# Altium PCB PCB3.PcbDoc (part 1 of 2)
Units mm, origin at the board's own origin, x right, y up, seen from the top; angles counter-clockwise.
Board outline 119.3 x 82.3 mm, 2 copper layers (Top Layer, Bottom Layer); 268 components, 205 nets, 699 pads, 173 vias.
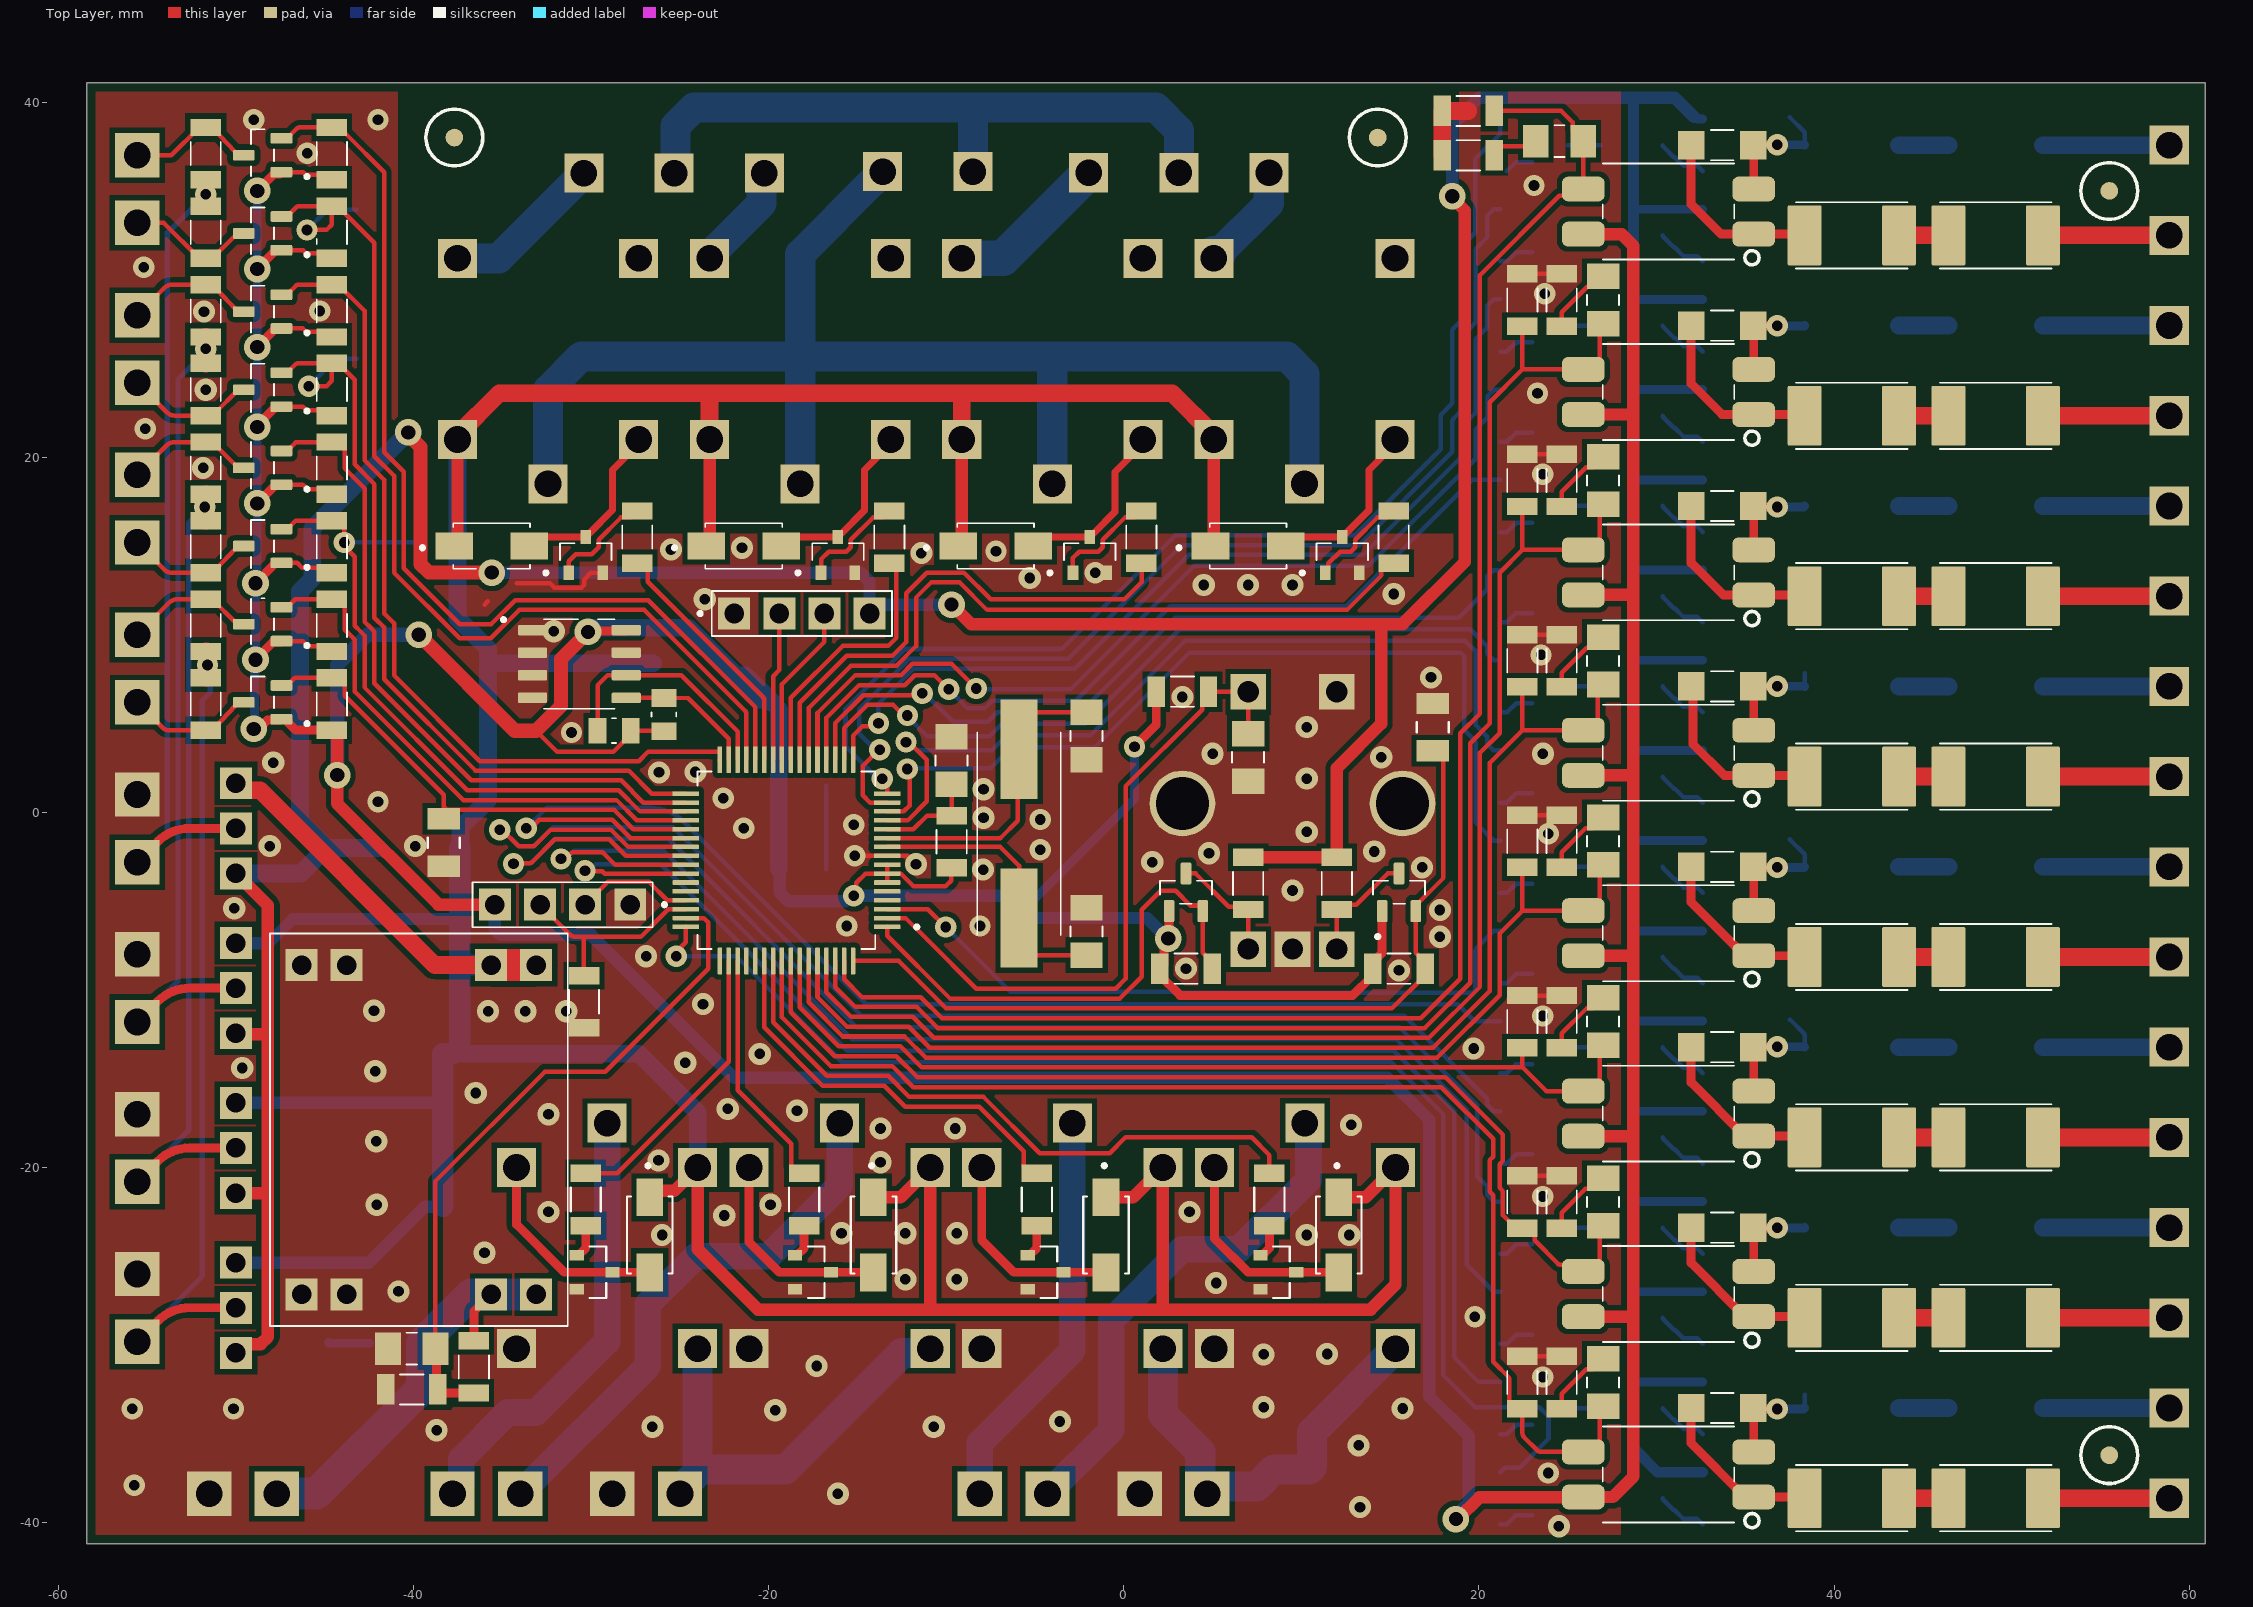
[diagram p0: Top Layer view]
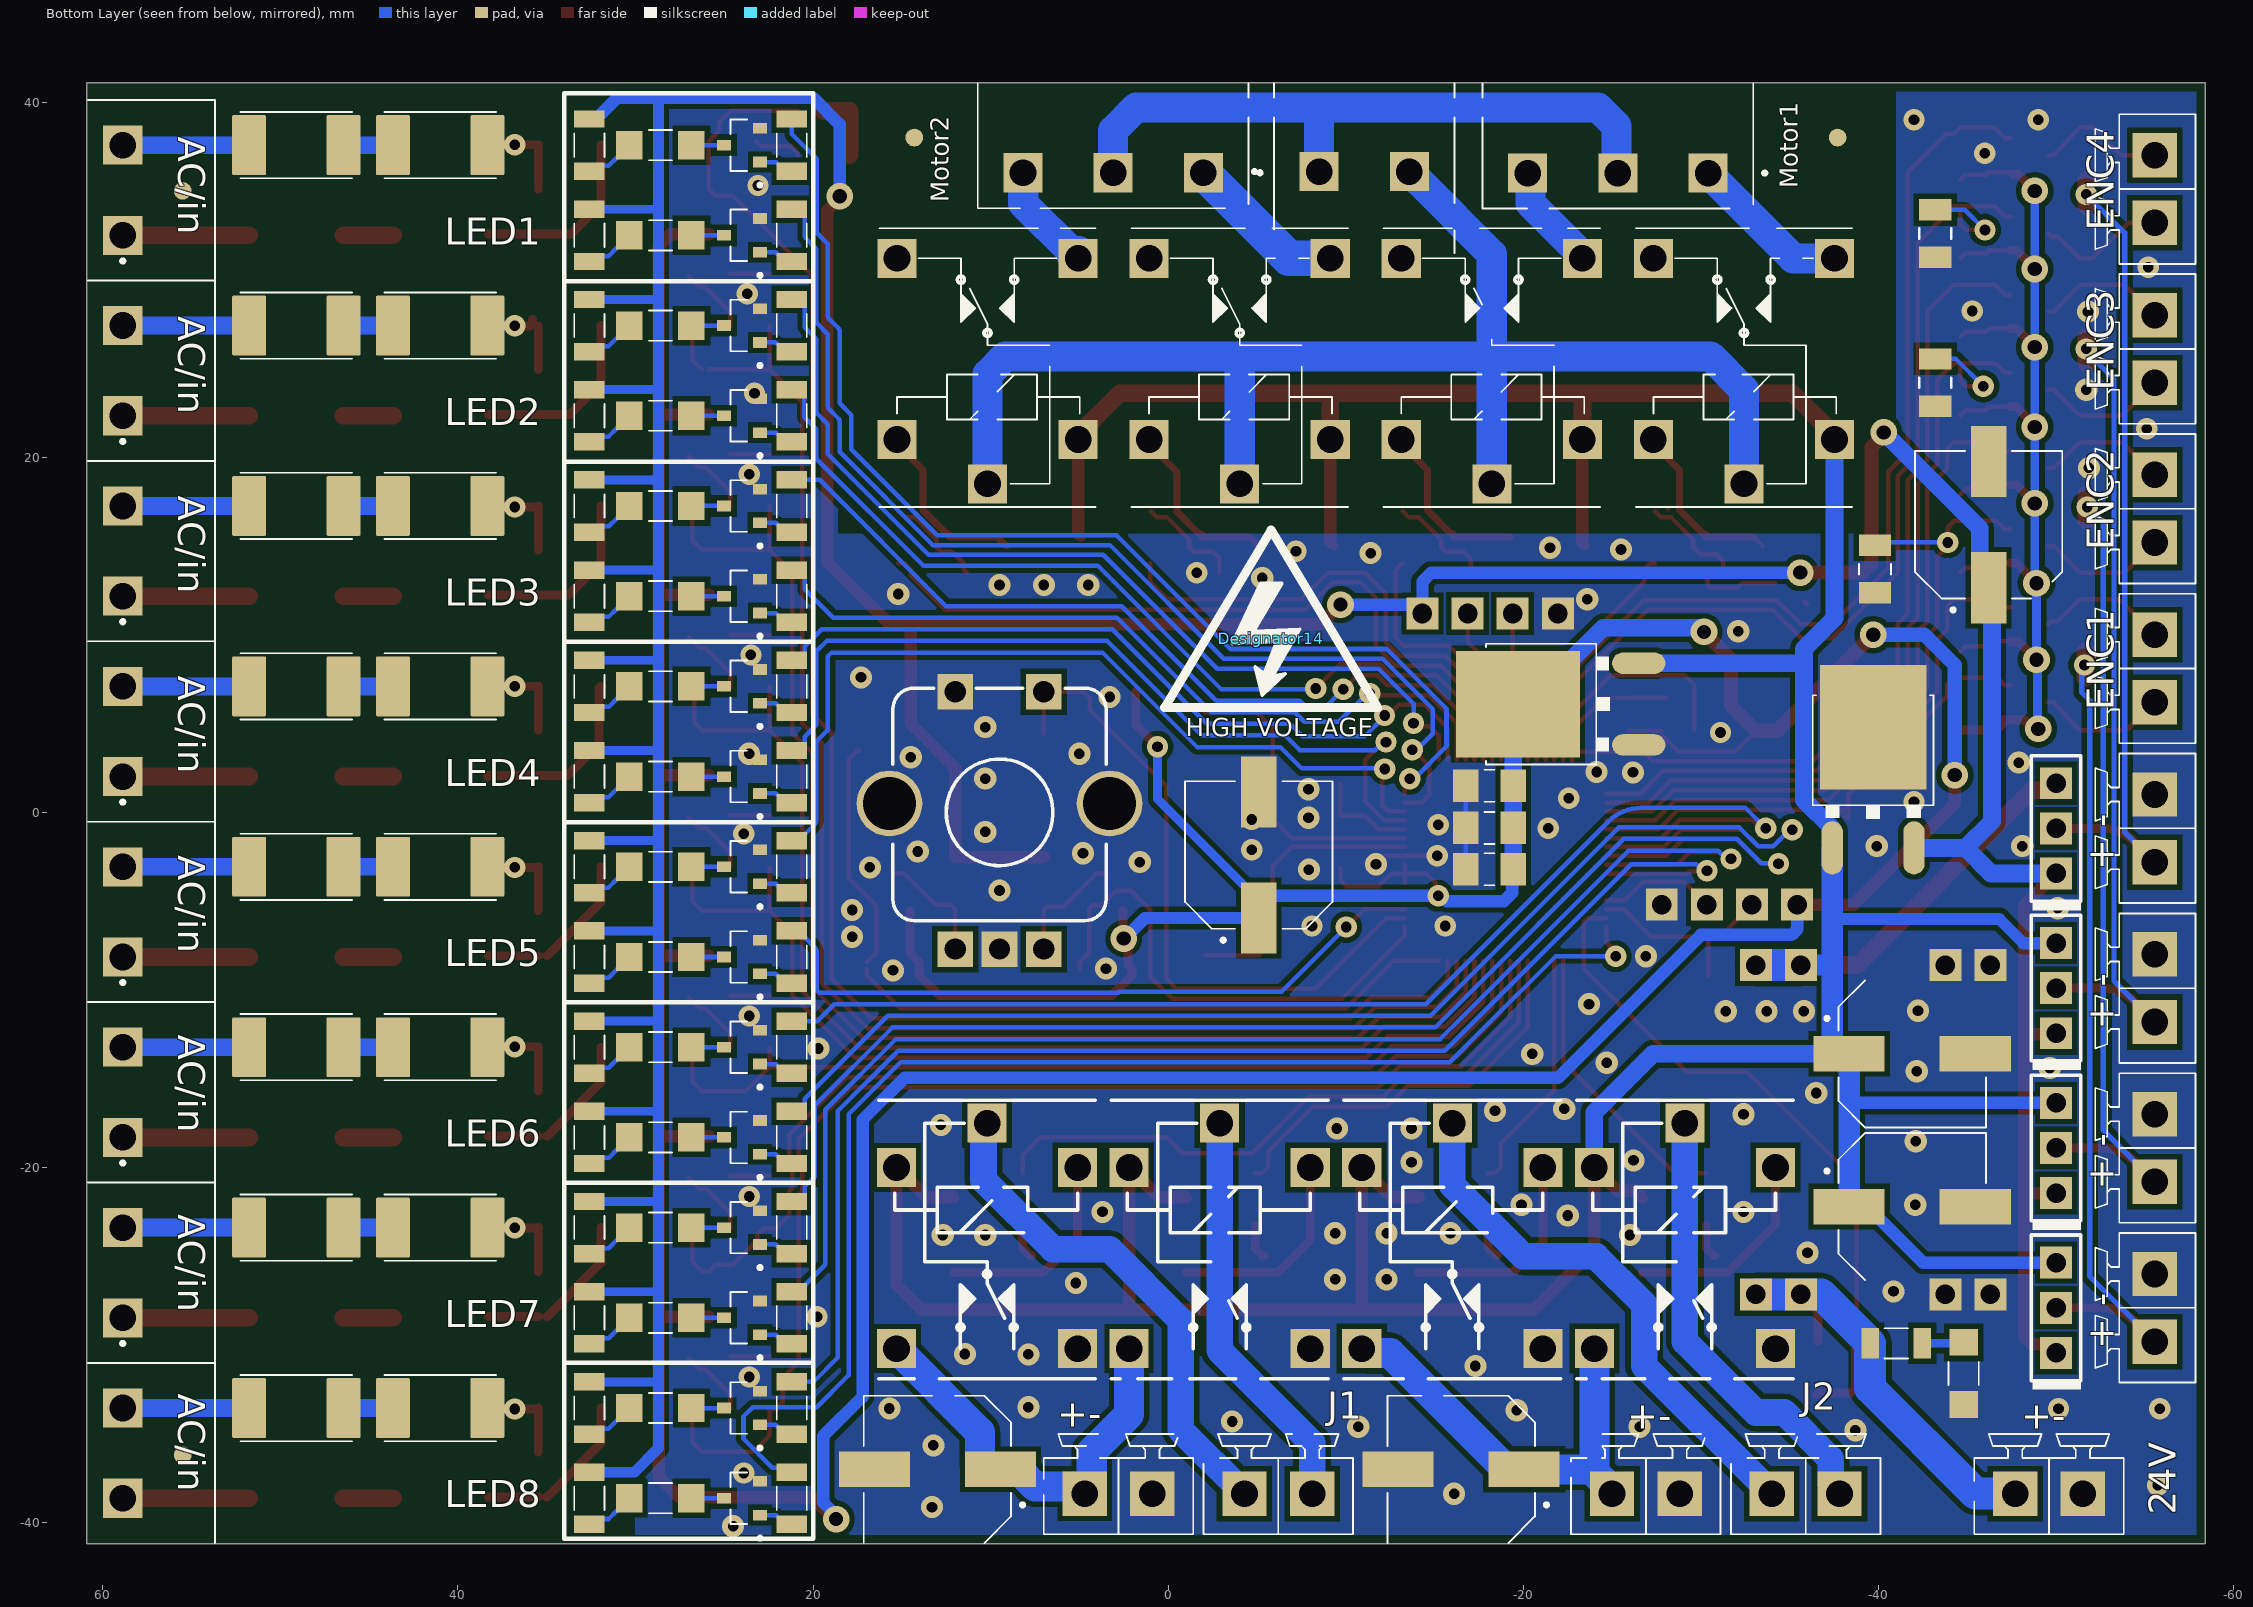
[diagram p1: Bottom Layer view, seen from below]

## Layer stack, top to bottom
Top Solder: solder mask 0.0102, Solder Resist, Dk 3.5
Top Layer: signal copper 0.0356
Dielectric 1: dielectric 0.32, FR-4, Dk 4.8
Bottom Layer: signal copper 0.0356
Bottom Solder: solder mask 0.0102, Solder Resist, Dk 3.5

## Board outline
-58.4,-41.2 -58.4,41.1 60.9,41.1 60.9,-41.2

## Design rules (kind name [scope] priority, off if disabled: settings)
AcuteAngle [All] p1: minimum=6.00000000000000E+0001 checktracksonly=FALSE
BoardOutlineClearance [All] p1: gap=0.5 ignorepadtopadclearanceinfootprint=FALSE
Clearance [All] p1: gap=0.3 ignorepadtopadclearanceinfootprint=FALSE
HoleSize [All] p1: absolutevalues=TRUE maxlimit=3 minlimit=0.5 maxpercent=80.000 minpercent=20.000
HoleToHoleClearance [All] p1: gap=0.8 allowstackedmicrovias=TRUE
MinimumAnnularRing [All] p1: minimumring=0.254
PlaneConnect [All] p1: planeconnectstyle=Direct reliefexpansion=0.508 reliefentries=4 reliefconductorwidth=0.254 reliefairgap=0.254
PolygonConnect [All] p1: connectstyle=Direct reliefconductorwidth=0.254 reliefentries=4 polygonreliefangle="90 Angle" airgapwidth=0.254
RoutingVias [All] p1: holewidth=0.6 width=1.2 viastyle="Through Hole" minholewidth=0.6 minwidth=1.2 maxholewidth=2 maxwidth=2
SolderMaskExpansion [All] p1: expansion=0.102 istentingtop=FALSE
SupplyNets "Schematic Supply Nets_1" [InNet('3.3v')] p1: voltage=0.000
SupplyNets "Schematic Supply Nets" [InNet('GND')] p2: voltage=0.000
Width [All] p1: maxlimit=5 minlimit=0.254 preferedwidth=0.254
27 further rules are at their usual default settings.

## Classes and differential pairs
component class MCU: fram? S? Y?

## Components (designator, comment, footprint, x,y, rotation, side; value= is the part's Value field where it differs from the comment)
*1 "" PCBComponent_1 -39.7,-17.873 r270 top
C1 "" CAP_EEEFN1H101L -41.9,-13.6 r180 bottom
C2 "" CAP_EEEFN1H101L -41.9,-22.2 r180 bottom
C3 "" CAP_EEEFN1H101L -46.2,16.2 r90 bottom
C4 "" CAPC3216X180N#1 -40.1,-30.2 r0 top
C5 "" CAP_EEEFN1H101L -5.1,-2.4 r90 bottom
C6 "" CAPC3216X180N#1 -2.1,4.3 r90 top
C7 "" CAPC3216X180N#1 -2.1,-6.7 r270 top
C8 "" CAPC3216X180N#2 -18.1,1.5 r180 bottom
C9 "" CAPC3216X180N#2 -18.1,-3.2 r180 bottom
C10 "" CAPC3216X180N#2 -18.1,-0.875 r180 bottom
C11 "" CAPC3216X180N#1 -9.7,2.921 r270 top
C12 "" CAPC3216X180N#3 -38.3,-1.7 r90 top
C13 "" CAP_EEEFN1H101L 13,-37 r0 bottom
C14 "" CAPC3216X180N#4 -43.2,32.6 r90 bottom
C15 "" CAPC3216X180N#1 7,3.1 r90 top
C16 "" CAPC3216X180N#3 17.4,4.8 r270 top
C17 "" CAPC3216X180N#1 26.992,18.695 r270 top locked
C18 "" CAPC3216X180N#1 24.536,37.8 r0 top locked
C19 "" CAPC3216X180N#1 26.992,28.855 r270 top locked
C20 "" CAPC3216X180N#1 26.992,8.535 r270 top locked
C21 "" CAPC3216X180N#1 26.992,-32.105 r270 top locked
C22 "" CAPC3216X180N#1 26.992,-11.785 r270 top locked
C23 "" CAPC3216X180N#1 26.992,-21.945 r270 top locked
C24 "" CAPC3216X180N#1 26.992,-1.625 r270 top locked
C25 "" CAPC3216X180N#4 -39.8,13.7 r90 bottom
C26 "" CAP_EEEFN1H101L -16.5,-37 r0 bottom
C27 "" CAPC3216X180N#4 -43.2,24.2 r90 bottom
D1 "" "WL-SMRW_1206 dome_normal use"#1 -44.8,-31.6 r90 bottom
D2 "" DIOM4325X250N -1,-23.8 r270 top
D3 "" DIOM4325X250N 12.1,-23.8 r270 top
D4 "" DIOM4325X250N -21.4,15 r0 top
D5 "" DIOM4325X250N -35.6,15 r0 top
D6 "" "WL-SMRW_1206 dome_normal use"#1 28.6,37.575 r0 bottom locked
D7 "" "WL-SMRW_1206 dome_normal use"#1 28.6,32.495 r0 bottom locked
D8 "" "WL-SMRW_1206 dome_normal use"#1 28.6,27.415 r0 bottom locked
D9 "" "WL-SMRW_1206 dome_normal use"#1 28.6,22.335 r0 bottom locked
D10 "" "WL-SMRW_1206 dome_normal use"#1 28.6,17.255 r0 bottom locked
D11 "" "WL-SMRW_1206 dome_normal use"#1 28.6,12.175 r0 bottom locked
D12 "" "WL-SMRW_1206 dome_normal use"#1 28.6,7.095 r0 bottom locked
D13 "" "WL-SMRW_1206 dome_normal use"#1 28.6,2.015 r0 bottom locked
D14 "" "WL-SMRW_1206 dome_normal use"#1 28.6,-3.065 r0 bottom locked
D15 "" "WL-SMRW_1206 dome_normal use"#1 28.6,-8.145 r0 bottom locked
D16 "" "WL-SMRW_1206 dome_normal use"#1 28.6,-13.225 r0 bottom locked
D17 "" "WL-SMRW_1206 dome_normal use"#1 28.6,-18.305 r0 bottom locked
D18 "" "WL-SMRW_1206 dome_normal use"#1 28.6,-23.385 r0 bottom locked
D19 "" "WL-SMRW_1206 dome_normal use"#1 28.6,-28.465 r0 bottom locked
D20 "" "WL-SMRW_1206 dome_normal use"#1 28.6,-33.545 r0 bottom locked
D21 "" "WL-SMRW_1206 dome_normal use"#1 28.6,-38.625 r0 bottom locked
D22 "" "WL-SMRW_1206 dome_normal use"#2 33.7,17.255 r0 top locked
D23 "" "WL-SMRW_1206 dome_normal use"#2 33.7,37.575 r0 top locked
D24 "" "WL-SMRW_1206 dome_normal use"#2 33.7,27.415 r0 top locked
D25 "" "WL-SMRW_1206 dome_normal use"#2 33.7,7.095 r0 top locked
D26 "" "WL-SMRW_1206 dome_normal use"#2 33.7,-33.545 r0 top locked
D27 "" "WL-SMRW_1206 dome_normal use"#2 33.7,-13.225 r0 top locked
D28 "" "WL-SMRW_1206 dome_normal use"#2 33.7,-23.385 r0 top locked
D29 "" "WL-SMRW_1206 dome_normal use"#2 33.7,-3.065 r0 top locked
D30 "" DIOM4325X250N -26.7,-23.8 r270 top
D31 "" DIOM4325X250N -14.1,-23.8 r270 top
D32 "" DIOM4325X250N 7,15 r0 top
D33 "" DIOM4325X250N -7.215,15 r0 top
Designator14 "Comment" SIGN_HIGHVOLTAGE -5.8,9.8 r180 bottom
EEPROM1 "" SOIC127P602X172-8N -30.658,8.357 r0 top
J1 "" PHOENIX_1715721 -5.96,31.485 r180 bottom
J2 "" SAMTEC_MTSW-104-24-G-S-230 -18.13,11.2 r180 top
J3 "" SAMTEC_MTSW-104-24-G-S-230 -31.604,-5.2 r0 top
J4 "" PHOENIX_1759020 -32.945,46 r0 bottom locked
J5 "" PHOENIX_1715721 63.475,19.795 r270 bottom locked
J6 "" PHOENIX_1715721 63.475,40.115 r270 bottom locked
J7 "" PHOENIX_1715721 63.475,29.955 r270 bottom locked
J8 "" PHOENIX_1715721 63.475,9.635 r270 bottom locked
J9 "" PHOENIX_1715721 63.475,-31.005 r270 bottom locked
J10 "" PHOENIX_1715721 63.475,-10.685 r270 bottom locked
J11 "" PHOENIX_1715721 63.475,-20.845 r270 bottom locked
J12 "" PHOENIX_1715721 63.475,-0.525 r270 bottom locked
J13 "" PHOENIX_1759020 -4.52,46.02 r0 bottom
JP1 "" HDRLP_F_1X3 -50,-27.9 r90 bottom value=HDRF3
JP2 "" HDRLP_F_1X3 -50,-0.9 r90 bottom value=HDRF3
JP3 "" HDRLP_F_1X3 -50,-18.9 r90 bottom value=HDRF3
JP4 "" HDRLP_F_1X3 -50,-9.9 r90 bottom value=HDRF3
K1 "" REL_SPDT_5_1512 -2.9,-20 r180 bottom value=RELAY_SPDT
K2 "" REL_SPDT_5_1512 10.2,-20 r180 bottom value=RELAY_SPDT
K3 "" REL_SPDT_5_1512 -18.225,21 r0 bottom value=RELAY_SPDT
K4 "" REL_SPDT_5_1512 -32.425,21 r0 bottom value=RELAY_SPDT
K5 "" REL_SPDT_5_1512 -29.1,-20 r180 bottom value=RELAY_SPDT
K6 "" REL_SPDT_5_1512 -16,-20 r180 bottom value=RELAY_SPDT
K7 "" REL_SPDT_5_1512 10.175,21 r0 bottom value=RELAY_SPDT
K8 "" REL_SPDT_5_1512 -4.025,21 r0 bottom value=RELAY_SPDT
P1 "" PHOENIX_1803578#1 -49.6,-39 r0 bottom
P2 "" PHOENIX_1803578#1 2.8,-39 r0 bottom
P3 "" PHOENIX_1803578#1 -6.2,-39 r0 bottom
P4 "" PHOENIX_1803578#1 -56.2,8.1 r270 bottom
P5 "" PHOENIX_1803578#1 -56.2,-27.9 r270 bottom
P6 "" PHOENIX_1803578#2 -56.2,-0.9 r270 bottom
P7 "" PHOENIX_1803578#1 -56.2,35.1 r270 bottom
P8 "" PHOENIX_1803578#1 -26.9,-39 r0 bottom
P9 "" PHOENIX_1803578#1 -35.9,-39 r0 bottom
P10 "" PHOENIX_1803578#1 -56.2,17.1 r270 bottom
P11 "" PHOENIX_1803578#1 -56.2,-18.9 r270 bottom
P12 "" PHOENIX_1803578#2 -56.2,-9.9 r270 bottom
P13 "" PHOENIX_1803578#1 -56.2,26.1 r270 bottom
Q1 "" SOT95P240X111-3N -48.5,10.596 r180 top
Q2 "" SOT95P240X111-3N -48.5,6.195 r180 top
Q3 "" TRANS_SS8050-G#1 -4.4,-25.9 r0 top
Q4 "" TRANS_SS8050-G#1 8.7,-25.9 r0 top
Q5 "" SOT95P240X111-3N -48.5,37.005 r180 top
Q6 "" SOT95P240X111-3N -48.5,32.604 r180 top
Q7 "" TRANS_SS8050-G#1 -16.1,14.5 r90 top
Q8 "" TRANS_SS8050-G#1 -30.3,14.5 r90 top
Q9 "" TRANS_SS8050-G#2 24,37.575 r0 bottom locked
Q10 "" TRANS_SS8050-G#2 24,32.495 r0 bottom locked
Q11 "" TRANS_SS8050-G#2 24,27.415 r0 bottom locked
Q12 "" TRANS_SS8050-G#2 24,22.335 r0 bottom locked
Q13 "" TRANS_SS8050-G#2 24,17.255 r0 bottom locked
Q14 "" TRANS_SS8050-G#2 24,12.175 r0 bottom locked
Q15 "" TRANS_SS8050-G#2 24,7.095 r0 bottom locked
Q16 "" TRANS_SS8050-G#2 24,2.015 r0 bottom locked
Q17 "" TRANS_SS8050-G#2 24,-3.065 r0 bottom locked
Q18 "" TRANS_SS8050-G#2 24,-8.145 r0 bottom locked
Q19 "" TRANS_SS8050-G#2 24,-13.225 r0 bottom locked
Q20 "" TRANS_SS8050-G#2 24,-18.305 r0 bottom locked
Q21 "" TRANS_SS8050-G#2 24,-23.385 r0 bottom locked
Q22 "" TRANS_SS8050-G#2 24,-28.465 r0 bottom locked
Q23 "" TRANS_SS8050-G#2 24,-33.545 r0 bottom locked
Q24 "" TRANS_SS8050-G#2 24,-38.625 r0 bottom locked
Q25 "" SOT95P240X111-3N 15.5,-4.5 r90 top
Q26 "" SOT95P240X111-3N 3.5,-4.5 r90 top
Q27 "" SOT95P240X111-3N -48.5,19.399 r180 top
Q28 "" SOT95P240X111-3N -48.5,14.998 r180 top
Q29 "" TRANS_SS8050-G#1 -29.8,-25.9 r0 top
Q30 "" TRANS_SS8050-G#1 -17.5,-25.9 r0 top
Q31 "" SOT95P240X111-3N -48.5,28.202 r180 top
Q32 "" SOT95P240X111-3N -48.5,23.801 r180 top
Q33 "" TRANS_SS8050-G#1 12.3,14.5 r90 top
Q34 "" TRANS_SS8050-G#1 -1.915,14.5 r90 top
R1 "" RESC3015X65N#1 -41,-29.9 r0 bottom
R2 "" RESC3015X65N#2 -36.6,-31.23 r90 top
R3 "" RESC3015X65N#2 -40.1,-32.5 r0 top
R4 "" RESC3015X65N#2 -30.4,-10.67 r270 top
R5 "" RESC3015X65N#2 -9.7,-1.652 r270 top
R6 "" RESC2012X65N -28.7,4.6 r0 top
R7 "" RESC2012X65N -25.9,5.5 r270 top
R8 "" RESC3015X65N#2 -51.7,10.529 r270 top
R9 "" RESC3015X65N#2 -51.7,6.1 r90 top
R10 "" RESC3015X65N#2 -44.6,10.529 r270 top
R11 "" RESC3015X65N#2 -44.6,6.1 r270 top
R12 "" RESC3015X65N#2 -4.9,-21.8 r90 top
R13 "" RESC3015X65N#2 8.2,-21.8 r90 top
R14 "" RESC3015X65N#2 -51.7,37.1 r270 top
R15 "" RESC3015X65N#2 -51.7,32.671 r90 top
R16 "" RESC3015X65N#2 -44.6,37.1 r270 top
R17 "" RESC3015X65N#2 -44.6,32.671 r270 top
R18 "" RESC3015X65N#2 -13.2,15.5 r270 top
R19 "" RESC3015X65N#2 -27.4,15.5 r270 top
R20 "" RESC3015X65N#1 32.6,37.575 r90 bottom locked
R21 "" RESC3015X65N#1 32.6,32.495 r90 bottom locked
R22 "" RESC3015X65N#1 32.6,27.415 r90 bottom locked
R23 "" RESC3015X65N#1 32.6,22.335 r90 bottom locked
R24 "" RESC3015X65N#1 32.6,17.255 r90 bottom locked
R25 "" RESC3015X65N#1 32.6,12.175 r90 bottom locked
R26 "" RESC3015X65N#1 32.6,7.095 r90 bottom locked
R27 "" RESC3015X65N#1 32.6,2.015 r90 bottom locked
R28 "" RESC3015X65N#1 21.2,37.575 r90 bottom locked
R29 "" RESC3015X65N#1 21.2,32.495 r90 bottom locked
R30 "" RESC3015X65N#1 21.2,27.415 r90 bottom locked
R31 "" RESC3015X65N#1 21.2,22.335 r90 bottom locked
R32 "" RESC3015X65N#1 21.2,17.255 r90 bottom locked
R33 "" RESC3015X65N#1 21.2,12.175 r90 bottom locked
R34 "" RESC3015X65N#1 21.2,7.095 r90 bottom locked
R35 "" RESC3015X65N#1 21.2,2.015 r90 bottom locked
R36 "" RESC3015X65N#1 32.6,-3.065 r90 bottom locked
R37 "" RESC3015X65N#1 32.6,-8.145 r90 bottom locked
R38 "" RESC3015X65N#1 32.6,-13.225 r90 bottom locked
R39 "" RESC3015X65N#1 32.6,-18.305 r90 bottom locked
R40 "" RESC3015X65N#1 32.6,-23.385 r90 bottom locked
R41 "" RESC3015X65N#1 32.6,-28.465 r90 bottom locked
R42 "" RESC3015X65N#1 32.6,-33.545 r90 bottom locked
R43 "" RESC3015X65N#1 32.6,-38.625 r90 bottom locked
R44 "" RESC3015X65N#1 21.2,-3.065 r90 bottom locked
R45 "" RESC3015X65N#1 21.2,-8.145 r90 bottom locked
R46 "" RESC3015X65N#1 21.2,-13.225 r90 bottom locked
R47 "" RESC3015X65N#1 21.2,-18.305 r90 bottom locked
R48 "" RESC3015X65N#1 21.2,-23.385 r90 bottom locked
R49 "" RESC3015X65N#1 21.2,-28.465 r90 bottom locked
R50 "" RESC3015X65N#1 21.2,-33.545 r90 bottom locked
R51 "" RESC3015X65N#1 21.2,-38.625 r90 bottom locked
R52 "" RESC3015X65N#2 3.3,6.8 r180 top locked
R53 "" RESC3015X65N#2 12,-4 r90 top locked
R54 "" RESC3015X65N#2 7,-4 r90 top locked
R55 "" RESC3015X65N#2 15.5,-8.8 r0 top
R56 "" RESC3015X65N#2 3.5,-8.8 r180 top
R57 "" RESC6331X70N#1 49.1,12.175 r180 top locked
R58 "" RESC6331X70N#1 41,12.175 r180 top locked
R59 "" RESC6331X70N#1 49.1,32.495 r180 top locked
R60 "" RESC6331X70N#1 41,32.495 r180 top locked
R61 "" RESC6331X70N#2 49.1,17.255 r180 bottom locked
R62 "" RESC6331X70N#2 41,17.255 r180 bottom locked
R63 "" RESC6331X70N#2 49.1,37.575 r180 bottom locked
R64 "" RESC6331X70N#2 41,37.575 r180 bottom locked
R65 "" RESC3015X65N#2 22.45,18.695 r270 top locked
R66 "" RESC3015X65N#2 19.4,39.5 r0 top
R67 "" RESC3015X65N#2 24.656,18.695 r270 top locked
R68 "" RESC3015X65N#2 19.4,37 r0 top
R69 "" RESC6331X70N#1 49.1,22.335 r180 top locked
R70 "" RESC6331X70N#1 41,22.335 r180 top locked
R71 "" RESC6331X70N#1 49.1,2.015 r180 top locked
R72 "" RESC6331X70N#1 41,2.015 r180 top locked
R73 "" RESC6331X70N#2 49.1,27.415 r180 bottom locked
R74 "" RESC6331X70N#2 41,27.415 r180 bottom locked
R75 "" RESC6331X70N#2 49.1,7.095 r180 bottom locked
R76 "" RESC6331X70N#2 41,7.095 r180 bottom locked
R77 "" RESC3015X65N#2 22.45,28.855 r270 top locked
R78 "" RESC3015X65N#2 22.45,8.535 r270 top locked
R79 "" RESC3015X65N#2 24.656,28.855 r270 top locked
R80 "" RESC3015X65N#2 24.656,8.535 r270 top locked
R81 "" RESC6331X70N#1 49.1,-38.625 r180 top locked
R82 "" RESC6331X70N#1 41,-38.625 r180 top locked
R83 "" RESC6331X70N#1 49.1,-18.305 r180 top locked
R84 "" RESC6331X70N#1 41,-18.305 r180 top locked
R85 "" RESC6331X70N#2 49.1,-33.545 r180 bottom locked
R86 "" RESC6331X70N#2 41,-33.545 r180 bottom locked
R87 "" RESC6331X70N#2 49.1,-13.225 r180 bottom locked
R88 "" RESC6331X70N#2 41,-13.225 r180 bottom locked
R89 "" RESC3015X65N#2 22.45,-32.105 r270 top locked
R90 "" RESC3015X65N#2 22.45,-11.785 r270 top locked
R91 "" RESC3015X65N#2 24.656,-32.105 r270 top locked
R92 "" RESC3015X65N#2 24.656,-11.785 r270 top locked
R93 "" RESC6331X70N#1 49.1,-28.465 r180 top locked
R94 "" RESC6331X70N#1 41,-28.465 r180 top locked
R95 "" RESC6331X70N#1 49.1,-8.145 r180 top locked
R96 "" RESC6331X70N#1 41,-8.145 r180 top locked
R97 "" RESC6331X70N#2 49.1,-23.385 r180 bottom locked
R98 "" RESC6331X70N#2 41,-23.385 r180 bottom locked
R99 "" RESC6331X70N#2 49.1,-3.065 r180 bottom locked
R100 "" RESC6331X70N#2 41,-3.065 r180 bottom locked
R101 "" RESC3015X65N#2 22.45,-21.945 r270 top locked
R102 "" RESC3015X65N#2 22.45,-1.625 r270 top locked
R103 "" RESC3015X65N#2 24.656,-21.945 r270 top locked
R104 "" RESC3015X65N#2 24.656,-1.625 r270 top locked
R105 "" RESC3015X65N#2 -51.7,19.386 r270 top
R106 "" RESC3015X65N#2 -51.7,14.957 r90 top
R107 "" RESC3015X65N#2 -44.6,19.386 r270 top
R108 "" RESC3015X65N#2 -44.6,14.957 r270 top
R109 "" RESC3015X65N#2 -30.3,-21.8 r90 top
R110 "" RESC3015X65N#2 -18,-21.8 r90 top
R111 "" RESC3015X65N#2 -51.7,28.243 r270 top
R112 "" RESC3015X65N#2 -51.7,23.814 r90 top
R113 "" RESC3015X65N#2 -44.6,28.243 r270 top
R114 "" RESC3015X65N#2 -44.6,23.814 r270 top
R115 "" RESC3015X65N#2 15.2,15.5 r270 top
R116 "" RESC3015X65N#2 0.985,15.5 r270 top
SW1 "" SWROT_11MM 9.5,0 r180 bottom value=RotaryEncoderSwitch
U1 "" DPAK_3 -39.7,-2 r180 bottom value=LF50
U2 "" DPAK_3 -26.5,6.1 r90 bottom
U3 "" QFP50P1200X1200X160-64N -19,-2.7 r180 top locked
U4 "" DIP_4SMD 30.675,13.515 r180 top locked value=EL817
U5 "" DIP_4SMD 30.675,33.835 r180 top locked value=EL817
U6 "" DIP_4SMD 30.675,23.675 r180 top locked value=EL817
U7 "" DIP_4SMD 30.675,3.355 r180 top locked value=EL817
U8 "" DIP_4SMD 30.675,-37.285 r180 top locked value=EL817
U9 "" DIP_4SMD 30.675,-16.965 r180 top locked value=EL817
U10 "" DIP_4SMD 30.675,-27.125 r180 top locked value=EL817
U11 "" DIP_4SMD 30.675,-6.805 r180 top locked value=EL817
Y1 "" XTAL_ABLS2-12.000MHZ-D4Y-T -5.9,-1.2 r90 top
? "" FIDUCIAL1SM3 55.5,35 r0 top
? "" FIDUCIAL1SM3 55.5,-36.2 r0 top
? "" FIDUCIAL1SM3 14.3,38 r0 top
? "" FIDUCIAL1SM3 -37.7,38 r0 top

## Footprints (in the part's own frame and the unit in brackets; to place one, negate y for a bottom-side part, rotate by r counter-clockwise, add the part's x,y. Pads: shape width x height; smd on the part's side, far side on the other; paste and mask are expansions set on the pad)
CAP_EEEFN1H101L [mm]
  rect 4x2 smd mask+0.102: 1(-3.55,0) 2(3.55,0)
  silkscreen extent -4.9,-4.15 4.15,4.15, body extent -4.85,-4.15 4.85,4.15, height 10.2
CAPC3216X180N#1 [mm]
  rect 1.44x1.82 smd mask-2539.97: 1(-1.336,0) 2(1.336,0)
  silkscreen extent -0.29,-0.9 0.29,0.9, body extent -1.6,-0.8 1.6,0.8, height 1.8
CAPC3216X180N#2 [mm]
  rect 1.44x1.82 smd mask+0.102: 1(-1.336,0) 2(1.336,0)
  silkscreen extent -0.29,-0.9 0.29,0.9, body extent -1.6,-0.8 1.6,0.8, height 1.8
CAPC3216X180N#3 [mm]
  rect 1.2x1.82 smd: 1(-1.336,0) 2(1.336,0)
  silkscreen extent -0.29,-0.9 0.29,0.9, body extent -1.6,-0.8 1.6,0.8, height 1.8
CAPC3216X180N#4 [mm]
  rect 1.2x1.82 smd mask+0.102: 1(-1.336,0) 2(1.336,0)
  silkscreen extent -0.29,-0.9 0.29,0.9, body extent -1.6,-0.8 1.6,0.8, height 1.8
DIOM4325X250N [mm]
  rect 2.12x1.5 smd mask-2539.97: A(2.115,0) C(-2.115,0)
  silkscreen extent -4,-1.28 2.16,1.28, body extent -2.57,-1.28 2.57,1.28, height 2.5
DIP_4SMD [mm] "DIP4, pitch 2.54mm, 300mil Width SMD"
  rrect50% 2.4x1.4 smd mask-2539.97: 1(-4.8,1.27) 2(-4.8,-1.27) 3(4.8,-1.27) 4(4.8,1.27)
  silkscreen extent -5.1,-2.7 3.7,3, body extent -5.23,-2.55 5.23,2.55, height 4.6
DPAK_3 [mm] "D-PAK (TO-252), 3-Pads, Body 6.2x6.7mm"
  oval 1.2x3 smd mask+0.102: 1(-2.3,0) 3(2.3,0)
  rect 6x7 smd paste-5 mask+0.102: 4(0,6.8)
  silkscreen extent -3.4,1.63 3.4,8.6, body extent -3.37,-0.5 3.37,9.6, height 2.37
FIDUCIAL1SM3 [mm] "FIDUCIAL 1mm Pad, 3mm SolderMask"
  round 1 smd far side paste-1.016 mask+1: ""(0,0)
  round 1 smd paste-1 mask+1: ""(0,0)
  silkscreen extent -1.6,-1.6 1.6,1.6
HDRLP_F_1X3 [mm] "Connector Socket, Single-row 1-position, 0.100\" pitch"
  rect 1.8x1.8 hole 1.1 mask-2539.97: 1(-2.54,0) 2(0,0) 3(2.54,0)
  silkscreen extent -4.6,-1.4 4.1,1.4, body extent -4,-1.27 4,1.27, height 4.19
PCBComponent_1 [mm]
  rect 1.8x1.8 hole 1.1 mask-2539.97: 1(9.271,4.064) 1(9.271,6.604) 2(9.271,-6.604) 2(9.271,-4.064) 3(-9.271,-6.604) 3(-9.271,-4.064) 4(-9.271,4.064) 4(-9.271,6.604)
  silkscreen extent -11.05,-8.38 11.05,8.38
PHOENIX_1715721 [mm]
  rect 2.2x2.2 hole 1.5 mask-2539.97: 1(2.54,4.6) 2(7.62,4.6)
  silkscreen extent -1.2,0 10.16,9.56
PHOENIX_1759020 [mm]
  rect 2.2x2.2 hole 1.5 mask-2539.97: 01(2.54,10) 02(7.62,10) 03(12.7,10)
  silkscreen extent -0.75,4.95 15.24,12
PHOENIX_1803578#1 [mm]
  rect 2.5x2.5 hole 1.5 mask-2539.97: 1(-1.905,-0.635) 2(1.905,-0.635)
  silkscreen extent -4.21,-4 4.21,1.66, body extent -4.21,-8.05 4.21,8.05, height 11.1
PHOENIX_1803578#2 [mm]
  rect 2.5x2.5 hole 1.5: 1(-1.905,-0.635) 2(1.905,-0.635)
  silkscreen extent -4.21,-4 4.21,1.66, body extent -4.21,-8.05 4.21,8.05, height 11.1
QFP50P1200X1200X160-64N [mm]
  rrect25% 1.5x0.254 smd mask-2539.97: 1(-5.67,3.75) 2(-5.67,3.25) 3(-5.67,2.75) 4(-5.67,2.25) 5(-5.67,1.75) 6(-5.67,1.25) 7(-5.67,0.75) 8(-5.67,0.25) 9(-5.67,-0.25) 10(-5.67,-0.75) 11(-5.67,-1.25) 12(-5.67,-1.75) 13(-5.67,-2.25) 14(-5.67,-2.75) 15(-5.67,-3.25) 16(-5.67,-3.75) 33(5.67,-3.75) 34(5.67,-3.25) 35(5.67,-2.75) 36(5.67,-2.25) 37(5.67,-1.75) 38(5.67,-1.25) 39(5.67,-0.75) 40(5.67,-0.25) 41(5.67,0.25) 42(5.67,0.75) 43(5.67,1.25) 44(5.67,1.75) 45(5.67,2.25) 46(5.67,2.75) 47(5.67,3.25) 48(5.67,3.75)
  rrect25% 0.254x1.5 smd mask-2539.97: 17(-3.75,-5.67) 18(-3.25,-5.67) 19(-2.75,-5.67) 20(-2.25,-5.67) 21(-1.75,-5.67) 22(-1.25,-5.67) 23(-0.75,-5.67) 24(-0.25,-5.67) 25(0.25,-5.67) 26(0.75,-5.67) 27(1.25,-5.67) 28(1.75,-5.67) 29(2.25,-5.67) 30(2.75,-5.67) 31(3.25,-5.67) 32(3.75,-5.67) 49(3.75,5.67) 50(3.25,5.67) 51(2.75,5.67) 52(2.25,5.67) 53(1.75,5.67) 54(1.25,5.67) 55(0.75,5.67) 56(0.25,5.67) 57(-0.25,5.67) 58(-0.75,5.67) 59(-1.25,5.67) 60(-1.75,5.67) 61(-2.25,5.67) 62(-2.75,5.67) 63(-3.25,5.67) 64(-3.75,5.67)
  silkscreen extent -7.44,-5 5,5, body extent -6,-6 6,6, height 1.6
REL_SPDT_5_1512 [mm] "RELAY, SPDT, 15.40x12.10x14.0mm, G8QN, SUN HOLD RAM"
  rect 2.2x2.2 hole 1.5 mask-2539.97: 1(0,2.5) 2(5.1,-10.2) 3(-5.1,-10.2) 4(-5.1,0) 5(5.1,0)
  silkscreen extent -6.1,-11.9 6.1,3.8, body extent -6,-11.8 6,3.7, height 14
RESC2012X65N [mm]
  rect 1x1.42 smd mask-2539.97: 1(-0.935,0) 2(0.935,0)
  silkscreen extent -0.12,-0.7 0.12,0.7, body extent -1,-0.63 1,0.63, height 0.65
RESC3015X65N#1 [mm]
  rect 0.98x1.72 smd mask+0.102: 1(-1.47,0) 2(1.47,0)
  silkscreen extent -0.66,-0.85 0.66,0.85, body extent -1.53,-0.77 1.53,0.77, height 0.65
RESC3015X65N#2 [mm]
  rect 0.98x1.72 smd mask-2539.97: 1(-1.47,0) 2(1.47,0)
  silkscreen extent -0.66,-0.85 0.66,0.85, body extent -1.53,-0.77 1.53,0.77, height 0.65
RESC6331X70N#1 [mm]
  rrect7% 1.9x3.37 smd mask-2539.97: 1(-2.66,0) 2(2.66,0)
  silkscreen extent -3.15,-1.87 3.15,1.87
RESC6331X70N#2 [mm]
  rrect7% 1.9x3.37 smd mask+0.102: 1(-2.66,0) 2(2.66,0)
  silkscreen extent -3.15,-1.87 3.15,1.87
SAMTEC_MTSW-104-24-G-S-230 [mm]
  rect 1.8x1.8 hole 1.1 mask-2539.97: 01(3.81,0) 02(1.27,0) 03(-1.27,0) 04(-3.81,0)
  silkscreen extent -5.08,-1.27 5.83,1.27
SIGN_HIGHVOLTAGE [mm] "SIGN, HIGH VOLTAGE HAZARD, 12X12.5mm"
  silkscreen extent -6,-3.9 6,6.1
SOIC127P602X172-8N [mm]
  rrect25% 1.64x0.59 smd mask-2539.97: 0(-2.635,1.905) 1(-2.635,0.635) 2(-2.635,-0.635) 3(-2.635,-1.905) 4(2.635,-1.905) 5(2.635,-0.635) 6(2.635,0.635) 7(2.635,1.905)
  silkscreen extent -4.37,-2.52 1.99,2.59, body extent -3.01,-2.44 3.01,2.44, height 1.73
SOT95P240X111-3N [mm]
  rrect25% 1.23x0.6 smd mask-2539.97: 1(-1.06,0.95) 2(-1.06,-0.95) 3(1.06,0)
  silkscreen extent -2.6,-1.46 0.65,1.3
SWROT_11MM [mm] "Alps Encoder+ sw"
  rect 2x2 hole 1.2 mask-2539.97: 1(-2.5,-7.7) 2(0,-7.7) 3(2.5,-7.7) 4(2.5,6.8) 5(-2.5,6.8)
  round 3.7 hole 3 mask-2539.97: SH1(-6.2,0.5) SH2(6.2,0.5)
  silkscreen extent -6,-6.1 6,7, body extent -6.85,-7.83 6.81,7, height 21.2
TRANS_SS8050-G#1 [mm]
  rect 0.8x0.6 smd mask-2539.97: 1(-1.01,0.95) 2(-1.01,-0.95) 3(1.01,0)
  silkscreen extent -0.29,-1.45 0.65,1.45
TRANS_SS8050-G#2 [mm]
  rect 0.8x0.6 smd mask+0.102: 1(-1.01,0.95) 2(-1.01,-0.95) 3(1.01,0)
  silkscreen extent -1.11,-1.45 0.65,2.35
"WL-SMRW_1206 dome_normal use"#1 [mm] "SMD Mono-color Reverse mount LED, body 3.2x1.2mm"
  rect 1.5x1.6 smd mask+0.102: 1(-1.75,0) 2(1.75,0)
  silkscreen extent -0.65,-0.85 0.65,0.85, body extent -1.6,-0.8 1.6,0.8, height 1.85
"WL-SMRW_1206 dome_normal use"#2 [mm] "SMD Mono-color Reverse mount LED, body 3.2x1.2mm"
  rect 1.5x1.6 smd mask-2539.97: 1(-1.75,0) 2(1.75,0)
  silkscreen extent -0.65,-0.85 0.65,0.85, body extent -1.6,-0.8 1.6,0.8, height 1.85
XTAL_ABLS2-12.000MHZ-D4Y-T [mm]
  rect 5.6x2.1 smd mask-2539.97: 1(-4.75,0) 2(4.75,0)
  silkscreen extent -5.7,-2.35 5.7,2.35, body extent -6.35,-2.35 6.35,2.35, height 3.16

## Part data
*1 EEPROM1: library part Component_1
C1 C2 C3 C5 C13 C26: library part EEEFN1H101L, "CAP ALUM 100UF 20% 50V SMD", Package="RADIAL-2 Panasonic", Check_prices=https://www.snapeda.com/parts/EEEFN1H101L/Panasonic/view-part/?ref=eda, MF=Panasonic, MP=EEEFN1H101L, SnapEDA_Link=https://www.snapeda.com/parts/EEEFN1H101L/Panasonic/view-part/?ref=snap
C4 C6 C7 C8 C9 C10 C11 C12 C14 C15 C16 C17 C18 C19 C20 C21 C22 C23 C24 C25 C27: library part CGA5L3X8R1H105M160AB, "1ÂµF Â±20% 50V Ceramic Capacitor X8R 1206 (3216 Metric)", Package="3216 TDK", Availability="In Stock", Check_prices=https://www.snapeda.com/parts/CGA5L3X8R1H105M160AB/TDK/view-part/?ref=eda, MF=TDK, MP=CGA5L3X8R1H105M160AB, Price=None, Purchase-URL=https://pricing.snapeda.com/search/part/CGA5L3X8R1H105M160AB/?ref=eda, SnapEDA_Link=https://www.snapeda.com/parts/CGA5L3X8R1H105M160AB/TDK/view-part/?ref=snap
D1 D6 D7 D8 D9 D10 D11 D12 D13 D14 D15 D16 D17 D18 D19 D20 D21 D22 D23 D24 D25 D26 D27 D28 D29: library part 156120RS82500, "WL-SMRW Mono-color Reverse mount Waterclear, SMT, size 1206 dome, Red, 2V, 20°", Case/Size Code="1206 dome", Emitting Color=Red, Forward Voltage=2V, Manufacturer="Wurth Elektronik", Operating Temperature Max=85°C, Operating Temperature Min=-40°C, Category="Signal LEDs", Chip Technology=AlInGaP, ComponentLink1Description="Website Link", ComponentLink1URL=https://www.we-online.com/redexpert/article/156120RS82500?ad, ComponentLink2Description="Datasheet Link", ComponentLink2URL=https://www.we-online.com/redexpert/spec/156120RS82500?ad, Dominant Wavelength=624nm, Height=1.85mm, Length=3.2mm, Luminous Intensity=1100mcd, Manufacturer Part Number=156120RS82500, Match Code=WL-SMRW, Mount="Surface Mount", Packaging="Tape and Reel", Peak Wavelength=632nm, Viewing Angle=20°, Width=1.6mm
D2 D3 D4 D5 D30 D31 D32 D33: library part SMAJ26A, "400W, 30.4V, 5%, Unidirectional, TVS", Package="SMA-2 Taiwan Semiconductor", Check_prices=https://www.snapeda.com/parts/SMAJ26A/taiwan/view-part/?ref=eda, MF="Taiwan Semiconductor", MP=SMAJ26A, SnapEDA_Link=https://www.snapeda.com/parts/SMAJ26A/taiwan/view-part/?ref=snap
J1 J5 J6 J7 J8 J9 J10 J11 J12: library part 1715721, Package=None, Availability=Unavailable, MP=1715721, Price=None
J2 J3: library part MTSW-104-24-G-S-230, Package=None, Availability=Unavailable, MP=MTSW-104-24-G-S-230, Price=None
J4 J13: library part 1759020, "Pluggable Header 5.08mm 12AWG 320V 12A 3 Position COMBICON MSTB Series", Package=None, Check_prices=https://www.snapeda.com/parts/1759020/Phoenix+Contact/view-part/?ref=eda, MF="Phoenix Contact", MP=1759020, SnapEDA_Link=https://www.snapeda.com/parts/1759020/Phoenix+Contact/view-part/?ref=snap
JP1 JP2 JP3 JP4: library part HDRLP_F_1X3, "CONN, HEADER, Male, pitch: 2.54mm, 3POS"
K1 K2 K3 K4 K5 K6 K7 K8: library part RELAY_SPDT_5_1512_G8QN, "Relay, SPDT, 5P, 15.4X12.1mm, 16V/30A", MANF=OMRON, MANF_P#="G8QN-1C4 DC12", PARAM="12V, 50mA", PARAM2="16VDC, 30A", Price=PRICE
P1 P2 P3 P4 P5 P6 P7 P8 P9 P10 P11 P12 P13: library part 1803578, "2 Position Terminal Block Plug, Female Sockets 0.150 (3.81mm) 180Â° Free Hanging (In-Line)", Package="Custom Package Phoenix Contact", Availability=Good, Check_prices=https://www.snapeda.com/parts/1803578/Phoenix%20Contact/view-part/46882/?ref=eda, MF="Phoenix Contact", MP=1803578, Price=None, Purchase-URL=https://pricing.snapeda.com/search/part/1803578/?ref=eda, SnapEDA_Link=https://www.snapeda.com/parts/1803578/Phoenix%20Contact/view-part/46882/?ref=snap
Q1 Q2 Q5 Q6 Q25 Q26 Q27 Q28 Q31 Q32: library part 2N7002, "N-Channel 60V 280mA (Ta) 350mW (Ta) Surface Mount SOT-23-3 (TO-236)", Package=None, Availability=Unavailable, MF="{'manufacturer': u'onsemi'}", MP=2N7002, Price=None
Q3 Q4 Q7 Q8 Q9 Q10 Q11 Q12 Q13 Q14 Q15 Q16 Q17 Q18 Q19 Q20 Q21 Q22 Q23 Q24 Q29 Q30 Q33 Q34: library part SS8050-G, "Bipolar (BJT) Transistor NPN 25 V 1.5 A 100MHz 300 mW Surface Mount SOT-23-3", Package=None, Check_prices=https://www.snapeda.com/parts/SS8050G/Comchip/view-part/?ref=eda, Digi-Key_Part_Number=641-1790-2-ND, MF=Comchip, MP=SS8050G, SnapEDA_Link=https://www.snapeda.com/parts/SS8050G/Comchip/view-part/?ref=snap
R1 R2 R3 R4 R5 R8 R9 R10 R11 R12 R13 R14 R15 R16 R17 R18 R19 R20 R21 R22 R23 R24 R25 R26 R27 R28 R29 R30 R31 R32 R33 R34 R35 R36 R37 R38 R39 R40 R41 R42 R43 R44 R45 R46 R47 R48 R49 R50 R51 R52 R53 R54 R55 R56 R65 R66 R67 R68 R77 R78 R79 R80 R89 R90 R91 R92 R101 R102 R103 R104 R105 R106 R107 R108 R109 R110 R111 R112 R113 R114 R115 R116: library part CPF1206B10KE1, "Res Thin Film 1206 10K Ohm 0.1% 1/8W Â±25ppm/Â°C Molded SMD SMD Paper T/R", Package=1206, Power_Rating=".125 W", Resistance=10K, Tolerance=.1%, Voltage_Rating="150 V", Check_prices=https://www.snapeda.com/parts/CPF1206B10KE1/TE+Connectivity/view-part/?ref=eda, EU_RoHS_Compliance=Compliant, MF="TE Connectivity", MP=CPF1206B10KE1, SnapEDA_Link=https://www.snapeda.com/parts/CPF1206B10KE1/TE+Connectivity/view-part/?ref=snap
R6 R7: library part CRGCQ0805J470R, "Fixed Resistor CRGCQ 0805 470R 5%", Package="2012 TE Connectivity", Check_prices=https://www.snapeda.com/parts/CRGCQ0805J470R/TE+Connectivity/view-part/?ref=eda, MF="TE Connectivity", MP=CRGCQ0805J470R, SnapEDA_Link=https://www.snapeda.com/parts/CRGCQ0805J470R/TE+Connectivity/view-part/?ref=snap
R57 R58 R59 R60 R61 R62 R63 R64 R69 R70 R71 R72 R73 R74 R75 R76 R81 R82 R83 R84 R85 R86 R87 R88 R93 R94 R95 R96 R97 R98 R99 R100: library part 5-2176246-2, "18 kOhms Â±5% 1.5W Chip Resistor 2512 (6432 Metric) Pulse Withstanding Thick Film", Package=None, Check_prices=https://www.snapeda.com/parts/5-2176246-2/TE+Connectivity+AMP+Connectors/view-part/?ref=eda, MF="TE Connectivity", MP=5-2176246-2, SnapEDA_Link=https://www.snapeda.com/parts/5-2176246-2/TE+Connectivity+AMP+Connectors/view-part/?ref=snap
SW1: library part SWROT_11MM, "SWITCH, ROTARY Encoder, 11mm Metal Shaft", ASSEMBLY=ASSEMBLY, DESC=DESCRIPTION, MANF=Alpha, MANF_PART#=RE111F-41B3N-15F-20P, PARAM=PARAM, Price=-
U1: library part VREG_LFXX_TO252, "REG, Linear, LDO0.45V, 0.5A, TO-252", MANF=ST, MANF_P#=LF33CDT, PARAM="LDO0.45V, 0.5A,  82dB@120Hz", PARAM2=1.5/1.8/2.5/3.3/5V, Price=1500t
U2: library part VREG_AMS1117_DPACK3
U3: library part STM32G070RBT6, "ARMÂ® CortexÂ®-M0+ STM32G0 Microcontroller IC 32-Bit Single-Core 64MHz 128KB (128K x 8) FLASH 64-LQFP (10x10)", Package="LQFP-64 STMicroelectronics", Check_prices=https://www.snapeda.com/parts/STM32G070RBT6/STMicroelectronics/view-part/?ref=eda, MF=STMicroelectronics, MP=STM32G070RBT6, SnapEDA_Link=https://www.snapeda.com/parts/STM32G070RBT6/STMicroelectronics/view-part/?ref=snap
U4 U5 U6 U7 U8 U9 U10 U11: library part OPTC_TR4P_EL817_SMD, "OPTOCOUPLER, TRANSISTOR, 4PIN", Package=DIP-4SMD, PARAM=IF=5mA, PARAM2="VCE = 5V", Price=300t@Paya
Y1: library part ABLS2-12.000MHZ-D4Y-T, "HC/49US (AT49) LOW PROFILE SURFACE MOUNT MICROPROCESSOR CRYSTAL", Package="HC49/US Abracon", Availability="In Stock", Check_prices=https://www.snapeda.com/parts/ABLS2-12.000MHZ-D4Y-T/Abracon+LLC/view-part/?ref=eda, MF=Abracon, MP=ABLS2-12.000MHZ-D4Y-T, Price=None, Purchase-URL=https://pricing.snapeda.com/search/part/ABLS2-12.000MHZ-D4Y-T/?ref=eda, SnapEDA_Link=https://www.snapeda.com/parts/ABLS2-12.000MHZ-D4Y-T/Abracon+LLC/view-part/?ref=snap

## Via types
v1: diameter 1.25, hole 0.6, Top Layer to Bottom Layer, tented both sides, 91 vias
v2: diameter 1.2, hole 0.6, Top Layer to Bottom Layer, tented both sides, 59 vias
v3: diameter 1.5, hole 0.8, Top Layer to Bottom Layer, 17 vias
v4: diameter 1.2, hole 0.6, Top Layer to Bottom Layer, 6 vias

## Nets (pads, with @x,y where several pads share a name; then routed paths per layer and width w, separated by ;. In a path a pad name is that pad's centre, name@x,y a point inside that pad or via, vN(x,y) a via of type N, cw(c..) or ccw(c..) an arc to the next point about the centre after c; other vN are vias at no path point)
3.3v: C5.1 C8.2 C9.2 C10.2 EEPROM1.7 J3.04 Q1.1 Q2.1 Q5.1 Q6.1 Q25.1 Q26.1 Q27.1 Q28.1 Q31.1 Q32.1 R5.2 R6.2 R7.2 R10.2 R11.2 R16.2 R17.2 R52.2 R55.1 R56.2 R107.2 R108.2 R113.2 R114.2 U2.4 U3.6 U3.7 U3.8 U4.4 U5.4 U6.4 U7.4 U8.4 U9.4 U10.4 U11.4 | length 398.9
  Top Layer w0.254: Q5.1@-47.54,35.955 Q5.1@-47.44,36.055 -46.21,36.055 -46.06,35.905 -44.875,35.905 R16.2@-44.6,35.63 ; Q1.1@-47.44,9.646 -46.225,9.646 -45.927,9.349 -44.89,9.349 R10.2@-44.6,9.059 ; Q28.1@-47.44,14.048 -46.548,14.048 -46.277,13.777 -44.89,13.777 R108.2@-44.6,13.487 ; Q27.1@-47.44,18.449 -46.225,18.449 -45.981,18.206 -44.89,18.206 R107.2@-44.6,17.916 ; Q32.1@-47.44,22.851 -46.225,22.851 -46.009,22.634 -44.89,22.634 R114.2@-44.6,22.344 ; Q31.1@-47.44,27.252 -46.225,27.252 -46.036,27.063 -44.89,27.063 R113.2@-44.6,26.773 ; Q6.1@-47.44,31.654 -46.224,31.654 -46.06,31.49 -44.889,31.49 R17.2@-44.6,31.201 ; -33.1,4.6 -31.9,3.4 -28.755,3.4 -27.765,4.39 R6.2@-27.765,4.6 -25.935,4.6 R7.2@-25.9,4.565 ; v2(-15.2,-4.7) -15.06,-4.56 -15.06,-3.96 -14.55,-3.45 U3.7@-13.33,-3.45 ; U3.6@-13.33,-3.95 U3.7@-13.33,-3.45 ; U3.8@-13.33,-2.95 U3.7@-13.33,-3.45 ; R5.2@-9.7,-3.122 -9.72,-3.142 -9.72,-3.845 -10.025,-4.15 -11.85,-4.15 -12.55,-3.45 U3.7@-13.33,-3.45
  Top Layer w0.5: v3(-49,4.7) -48.729,4.7 -48.234,5.195 -47.49,5.195 Q2.1@-47.44,5.245 ; v3(-48.9,8.6) -47.904,9.596 -47.49,9.596 Q1.1@-47.44,9.646 ; v3(-48.9,12.9) -48.9,12.903 -47.755,14.048 Q28.1@-47.44,14.048 ; v3(-48.8,17.4) -48.8,17.404 -47.755,18.449 Q27.1@-47.44,18.449 ; v3(-48.8,21.7) -48.8,21.806 -47.755,22.851 Q32.1@-47.44,22.851 ; v3(-48.8,26.2) -48.8,26.207 -47.755,27.252 Q31.1@-47.44,27.252 ; v3(-48.8,30.6) -48.8,30.609 -47.755,31.654 Q6.1@-47.44,31.654 ; v3(-48.8,35) -47.845,35.955 Q5.1@-47.54,35.955 ; Q2.1@-47.125,5.245 -47.075,5.195 -47.075,5.075 -46.63,4.63 R11.2@-44.6,4.63 -44.54,4.63 R11.2@-44.3,4.39 ; v3(-30.173,10.163) -30.119,10.217 -28.068,10.217 EEPROM1.7@-28.023,10.262 ; v4(0.6,3.7) 1.83,4.93 R52.2@1.83,6.8 ; v3@2.27,-7.601 2.27,-8.56 R56.2@2.03,-8.8 2.03,-9.17 3.169,-10.309 12.891,-10.309 13.978,-9.222 ccw(c13.851,-9.096) 14.03,-9.096 R55.1@14.03,-8.8 14.03,-8.504 cw(c14.208,-8.504) 14.082,-8.378 14.55,-7.91 Q25.1@14.55,-5.56 ; v3@2.55,-7.1 Q26.1@2.55,-5.56 ; U8.4@25.853,-38.577 U8.4@25.875,-38.555
  Top Layer w0.7: R11.2@-44.3,4.39 -44.3,0.5 -38.6,-5.2 J3.04@-35.414,-5.2 ; v3(18.7,-39.8) 18.801,-39.8 20.023,-38.577 U8.4@25.853,-38.577 ; U8.4@25.875,-38.555 27.545,-38.555 28.7,-37.4 28.7,-28.395 ; U10.4@25.875,-28.395 28.7,-28.395 ; U9.4@25.875,-18.235 28.7,-18.235 ; U11.4@25.875,-8.075 28.7,-8.075 ; U7.4@25.875,2.085 28.7,2.085 ; U4.4@25.875,12.245 28.7,12.245 ; U6.4@25.875,22.405 28.7,22.405 ; U5.4@25.875,32.565 28.035,32.565 28.7,31.9 28.7,22.405 ; 28.7,-28.395 28.7,-18.235 ; 28.7,-18.235 28.7,-8.075 ; 28.7,-8.075 28.7,2.085 ; 28.7,2.085 28.7,12.245 ; 28.7,12.245 28.7,22.405
  Top Layer w0.8: v3(-39.7,10) -34.3,4.6 -33.1,4.6 -32.243,5.457 -32.226,5.457 -31.773,5.91 -31.773,5.927 -31.7,6 -31.7,8.636 v3(-30.173,10.163)
  Bottom Layer w0.5: v3(-49,4.7) -48.95,4.75 -48.95,8.55 v3(-48.9,8.6) v3(-48.9,12.9) -48.8,13 v3(-48.8,17.4) v3(-48.8,21.7) v3(-48.8,26.2) v3(-48.8,30.6) v3(-48.8,35) ; -35.151,-6.871 ccw(c-35.08,-6.8) -35.08,-6.9 ; U2.4@-22,7.61 -20.49,6.1 -19.737,6.1 cw(c-19.737,6.01) -19.674,6.074 -19.462,5.862 cw(c-19.526,5.799) U2.4@-19.436,5.799 ; U2.4@-21.411,7.585 U2.4@-20.102,6.424 ; C9.2@-19.436,-3.193 ccw(c-19.419,-3.193) -19.431,-3.205 -19.392,-3.244 cw(c-19.404,-3.255) C9.2@-19.388,-3.255 ; C5.1@-5.35,-4.7 C5.1@-5.1,-4.95 ; C5.1@-5.1,-5.95 C5.1@-5.1,-4.95 ; v4(0.6,3.7) 0.6,0.75 C5.1@-5.1,-4.95
  Bottom Layer w0.7: J3.04@-35.414,-5.2 -35.414,-6.566 ccw(c-35.314,-6.566) -35.385,-6.636 -35.151,-6.871 ; -35.08,-6.9 -30,-6.9 -21.95,-14.95 14.85,-14.95 17.2,-17.3 17.2,-32.9 19.431,-35.131 19.431,-38.853 18.7,-39.584 v3(18.7,-39.8) ; C9.2@-19.387,-3.255 -19.387,-4.517 -18.904,-5 v2@-15.689,-5 ; v2(-15.2,-4.7) C5.1@-5.35,-4.7 ; C5.1@-5.1,-5.95 1.317,-5.95 2.467,-7.1 v3(2.5,-7.1)
  Bottom Layer w0.8: v3(-44.3,2.1) -44.3,8.3 -42.6,10 v3(-39.7,10)
  Bottom Layer w1: v3(-30.173,10.163) -29.936,10.4 -24.5,10.4 -22.7,8.6 -21.995,7.895 -21.995,7.705 -21.305,7.705 U2.4@-19.7,6.1 ; C9.2@-19.436,-3.193 C10.2@-19.436,-0.875 C8.2@-19.436,1.354 ; C8.2@-19.436,1.528 U2.4@-19.436,5.799
5v: C3.1 J2.04 JP1.1 JP2.1 JP3.1 JP4.1 R20.2 R21.2 R22.2 R23.2 R24.2 R25.2 R26.2 R27.2 R36.2 R37.2 R38.2 R39.2 R40.2 R41.2 R42.2 R43.2 R53.2 R54.2 U1.3 | length 334.1
  Top Layer w0.5: JP3.1@-50.428,-21.468 cw(c-50.36,-21.537) -50.36,-21.44 JP3.1@-50,-21.44 ; JP4.1@-50.428,-12.468 -50.36,-12.44 JP4.1@-50,-12.44 ; JP2.1@-50.428,-3.468 cw(c-50.36,-3.537) -50.36,-3.44 JP2.1@-50,-3.44 ; -48.26,-21.44 -48.2,-21.5
  Top Layer w0.7: JP1.1@-50,-30.44 -49.505,-29.945 -48.61,-29.945 -48.2,-29.535 -48.2,-21.5 -48.2,-5.24 JP2.1@-50,-3.44 ; JP3.1@-50,-21.44 -48.26,-21.44 ; JP4.1@-50,-12.44 -49.94,-12.5 -48.61,-12.5 ; v3(-9.7,11.7) -8.6,10.6 14.5,10.6 ; R54.2@7,-2.53 R53.2@12,-2.53 12,2.5 14.5,5 14.5,10.6 ; v3(18.5,34.7) 18.5,34.59 19.2,33.89 19.2,14.1 15.7,10.6 14.5,10.6
  Top Layer w0.8: v3(-40.3,21.4) -40.3,21.281 -39.6,20.581 -39.6,13.969 -39.131,13.5 v3(-35.6,13.5)
  Bottom Layer w0.5: 28.7,-32.075 R42.2@32.6,-32.075 ; 28.7,-27 28.705,-26.995 R41.2@32.6,-26.995 ; 28.7,-22 28.785,-21.915 R40.2@32.6,-21.915 ; 28.7,-16.8 28.735,-16.835 R39.2@32.6,-16.835 ; 28.7,-11.8 28.745,-11.755 R38.2@32.6,-11.755 ; 28.7,-6.7 28.725,-6.675 R37.2@32.6,-6.675 ; 28.7,-1.6 28.705,-1.595 R36.2@32.6,-1.595 ; 28.7,3.5 28.715,3.485 R27.2@32.6,3.485 ; 28.7,8.6 28.735,8.565 R26.2@32.6,8.565 ; 28.7,13.6 28.745,13.645 R25.2@32.6,13.645 ; 28.7,18.7 28.725,18.725 R24.2@32.6,18.725 ; 28.7,23.8 28.705,23.805 R23.2@32.6,23.805 ; 28.7,28.9 28.715,28.885 R22.2@32.6,28.885 ; 28.7,33.965 R21.2@32.6,33.965 ; R20.2@32.116,39.159 ccw(c32.391,39.434) 32.391,39.045 R20.2@32.6,39.045
  Bottom Layer w0.6: 28.7,33.965 28.7,28.9 28.7,23.8 28.7,18.7 28.7,13.6 28.7,8.6 28.7,3.5 28.7,-1.6 28.7,-6.7 28.7,-11.8 28.7,-16.8 28.7,-22 28.7,-27 28.7,-32.075 28.7,-35.8 30.055,-37.155 R43.2@32.6,-37.155 ; 28.708,33.965 28.708,40.25
  Bottom Layer w0.7: v3(-35.6,13.5) -14.813,13.5 -14.32,13.007 J2.04@-14.32,11.313 ; J2.04@-14.32,11.2 -13.82,11.7 v3(-9.7,11.7) ; v3(18.5,34.7) 18.5,38.745 20.005,40.25 28.708,40.25 31.025,40.25 R20.2@32.116,39.159
  Bottom Layer w1: JP2.1@-50,-3.44 -46.34,-3.44 -44.9,-2 ; U1.3@-42,-2 -44.9,-2 ; v3(-40.3,21.4) -45.7,16 -45.7,13.15 C3.1@-46.2,12.65 -46.4,12.45 -46.4,-0.5 -44.9,-2 ; v3(-35.6,13.5) v3@-35.504,13.404
12v: *1.4 C1.1 C2.1 D2.C D3.C D4.C D5.C D30.C D31.C D32.C D33.C JP1.3 JP2.3 JP3.3 JP4.3 K1.4 K2.4 K3.4 K4.4 K5.4 K6.4 K7.4 K8.4 U1.1 U2.3 | length 293.8
  Top Layer w0.5: D5.C@-37.715,15 D5.C@-37.525,15.19 ; K4.4@-37.525,21 K4.4@-37.525,21.25 ; D4.C@-23.515,15 D4.C@-23.325,15.19 ; D33.C@-9.33,15 D33.C@-9.125,15.205 ; D32.C@4.885,15.5 D32.C@5.075,15.69 ; K7.4@5.075,21 K7.4@5.075,21.25
  Top Layer w0.7: D5.C@-37.525,15.19 K4.4@-37.525,21 ; D30.C@-26.7,-21.685 -26.325,-21.31 -25.31,-21.31 K5.4@-24,-20 -24,-24.6 -20.6,-28 -10.9,-28 ; D4.C@-23.325,15.19 K3.4@-23.325,21 ; D31.C@-14.1,-21.685 -12.585,-21.685 K6.4@-10.9,-20 -10.9,-28 ; D33.C@-9.125,15.205 K8.4@-9.125,21 ; D2.C@-1,-21.685 0.515,-21.685 K1.4@2.2,-20 2.2,-28 ; D32.C@5.075,15.69 K7.4@5.075,21 ; D3.C@12.1,-21.685 13.615,-21.685 K2.4@15.3,-20 15.3,-26.6 13.9,-28 2.2,-28 ; -10.9,-28 2.2,-28
  Top Layer w1: JP2.3@-50,1.64 -49.6,1.24 -48.64,1.24 -38.798,-8.602 *1.4@-35.636,-8.602 ; K4.4@-37.525,21.25 -35.175,23.6 -23.325,23.6 ; K3.4@-23.325,21 -23.325,23.6 ; K8.4@-9.125,21 -9.125,23.6 ; K7.4@5.075,21.25 2.725,23.6 -9.125,23.6 ; -23.325,23.6 -9.125,23.6
  Top Layer w1.8: *1.4@-35.636,-8.602 *1.4@-33.096,-8.602
  Bottom Layer w0.65: -48.16,-7.36 -46.804,-6.004
  Bottom Layer w0.7: JP1.3@-50,-25.36 -42.51,-25.36 -39.35,-22.2 C2.1@-38.35,-22.2 ; JP3.3@-50,-16.36 -38.41,-16.36 -38.35,-16.3 ; JP4.3@-50,-7.36 -48.16,-7.36 ; -46.804,-6.004 -37.4,-6.004
  Bottom Layer w1: C1.1@-38.35,-13.6 C1.1@-37.9,-13.6 ; K4.4@-37.525,21 -37.525,10.925 -35.8,9.2 -35.8,8.4 ; C1.1@-37.4,-13.6 -27.3,-13.6 -24,-16.9 K5.4@-24,-20 ; U1.1@-37.4,-2 -37.362,-1.962 -37.362,-0.862 -35.8,0.7 -35.8,8.4 ; U2.3@-26.5,8.4 -35.8,8.4
  Bottom Layer w1.2: C2.1@-38.35,-22.2 -38.35,-16.3 C1.1@-38.35,-13.6 -37.8,-13.6 -37.4,-13.2 -37.4,-8.6 ; U1.1@-37.4,-2 -37.4,-6.004 -37.4,-8.6 ; *1.4@-35.636,-8.6 -37.4,-8.6
  Bottom Layer w1.8: *1.4@-35.636,-8.602 *1.4@-33.096,-8.602
24v: *1.1 P1.2 R1.2 R2.2 | length 23.7
  Top Layer w0.5: R2.2@-36.6,-29.76 -36.6,-28.108 *1.1@-35.636,-27.144
  Bottom Layer w1.8: P1.2@-47.695,-38.365 -45.465,-38.365 -39.53,-32.43 R1.2@-39.53,-29.9 -36.774,-27.144 *1.1@-35.636,-27.144 *1.1@-33.096,-27.144
24v_jack1: C13.1 K1.3 K2.3 P2.2 | length 24.3
  Bottom Layer w1.7: K1.3@2.2,-30.2 2.2,-33.9 4.305,-36.005 4.305,-37.965 P2.2@4.705,-38.365 5.105,-37.965 7.485,-37.965 8.45,-37 C13.1@9.45,-37 10.45,-37 10.6,-36.85 10.6,-34.9 K2.3@15.3,-30.2
24v_jack2: C26.1 K5.3 K6.3 P8.2 | length 24.1
  Bottom Layer w1.7: P8.2@-24.995,-38.365 -24.995,-38.149 -24,-37.154 K5.3@-24,-30.2 ; -23.63,-37 C26.1@-20.05,-37 -19.05,-37 -12.5,-30.45 -11.15,-30.45 K6.3@-10.9,-30.2
ENC-A: Q25.3 R53.1 SW1.1 | length 6.6
  Top Layer w0.254: SW1.1@12,-7.7 R53.1@12,-5.47 12.262,-5.208 13.092,-5.208 14.86,-3.44 Q25.3@15.5,-3.44
ENC-B: Q26.3 R54.1 SW1.3 | length 6.6
  Top Layer w0.254: Q26.3@3.5,-3.44 4.04,-3.44 5.908,-5.308 6.838,-5.308 R54.1@7,-5.47 SW1.3@7,-7.7
GND: *1.2 *1.3 C1.2 C2.2 C3.2 C4.1 C5.2 C6.1 C7.1 C8.1 C9.1 C10.1 C11.1 C12.1 C13.2 C14.1 C15.1 C16.1 C25.1 C26.2 C27.1 D1.1 EEPROM1.0 EEPROM1.1 EEPROM1.2 EEPROM1.3 EEPROM1.6 J2.01 J3.01 K1.2 K2.2 K5.2 K6.2 P1.1 P2.1 P5.1 P6.1 P8.1 P11.1 P12.1 Q3.2 Q4.2 Q7.2 Q8.2 Q9.2 Q10.2 Q11.2 Q12.2 Q13.2 Q14.2 Q15.2 Q16.2 Q17.2 Q18.2 Q19.2 Q20.2 Q21.2 Q22.2 Q23.2 Q24.2 Q29.2 Q30.2 Q33.2 Q34.2 R3.1 R4.2 R65.1 R66.1 R67.1 R68.1 R77.1 R78.1 R79.1 R80.1 R89.1 R90.1 R91.1 R92.1 R101.1 R102.1 R103.1 R104.1 SW1.2 SW1.5 SW1.SH1 SW1.SH2 U1.4 U2.1 U3.9 | length 33.5
  Top Layer w0.254: -36,11.7 -35.819,11.881 ; -34.2,12.9 -32.313,12.9 -32.076,12.663 -30.54,12.663 -30.392,12.812 -30.392,13.108 -30.01,13.49 Q8.2@-29.35,13.49 ; v2(-15.15,-2.45) -12.175,-2.45 v1(-11.7,-2.925) ; R89.1@22.45,-30.635 R91.1@24.656,-30.635 ; R101.1@22.45,-20.475 R103.1@24.656,-20.475 ; R90.1@22.45,-10.315 R92.1@24.656,-10.315 ; R102.1@22.45,-0.155 R104.1@24.656,-0.155 ; R78.1@22.45,10.005 R80.1@24.656,10.005 ; R65.1@22.45,20.165 R67.1@24.656,20.165 ; R77.1@22.45,30.325 R79.1@24.656,30.325
  Top Layer w1: R68.1@17.93,37 R66.1@17.93,39.5 19.4,39.5
  Bottom Layer w0.254: C9.1@-16.764,-3.2 C10.1@-16.764,-0.875 C8.1@-16.764,1.5
  other v1: 24.5,-40.2 13.3,-39.125 -16.1,-38.375 13.225,-35.65 -38.7,-34.8 -26.55,-34.6 -10.7,-34.6 -3.6,-34.3 -19.625,-33.675 15.7,-33.575 7.875,-33.5 -17.3,-31.175 7.875,-30.525 11.45,-30.5 -40.85,-26.975 5.2,-26.5 -12.3,-26.3 -9.4,-26.3 -36,-24.8 -26,-23.8 10.3,-23.8 12.7,-23.8 -15.9,-23.7 -12.3,-23.7 -9.4,-23.7 -22.5,-22.7 -32.4,-22.5 3.7,-22.5 -42.075,-22.1 -19.9,-22.1 -13.7,-19.7 -26.2,-19.6 -42.1,-18.525 -13.7,-17.8 -9.5,-17.8 12.8,-17.6 -32.4,-17 -18.4,-16.8 -22.3,-16.7 -36.5,-15.8 -42.15,-14.575 -49.65,-14.4 -24.7,-14.1 -20.5,-13.6 19.7,-13.3 -35.8,-11.2 -33.7,-11.2 -31.4,-11.2 -42.225,-11.175 -23.7,-10.8 15.5,-8.9 3.5,-8.8 -26.9,-8.1 17.8,-7 17.8,-5.5 -50.1,-5.4 9.5,-4.4 -7.925,-3.225 16.8,-3.1 1.6,-2.8 4.8,-2.3 14.1,-2.2 -48.1,-1.9 -39.9,-1.9 10.3,-1.1 -7.9,-0.3 -7.9,1.3 10.3,1.9 -26.175,2.25 -24.125,2.275 -47.9,2.8 14.5,3.1 5,3.3 23.6,3.3 10.3,4.8 3.3,6.5 17.3,7.6 -32.1,10.2 -23.6,12 15.2,12.3 4.5,12.8 7,12.8 9.5,12.8 -5.3,13.2 -11.4,14.6 -25.5,14.8 -21.5,14.9 -51.85,19.4 -51.7,23.8 -51.8,28.2
  other v2: -55.734,-37.886 23.9,-37.2 -55.834,-33.586 -50.134,-33.586 23.6,-31.8 19.773,-28.4 23.6,-21.633 23.6,-11.467 -15.6,-6.4 -8.1,-6.4 -4.7,-2.1 23.9,-1.2 -21.4,-0.9 -15.2,-0.7 -4.7,-0.4 -42,0.6 -22.555,0.787 -31.1,4.5 23.5,8.867 -1.6,13.5 -7.2,14.7 23.6,19.033 -55.1,21.6 23.3,23.6 -45.28,28.239 23.7,29.2 -55.2,30.7 23.1,35.3 -45.985,37.126 -49,39 -42,39
JACK-1-ENC-A: P4.2 Q2.3 R9.1 | length 7.3
  Top Layer w0.254: P4.2@-55.565,6.195 -54.157,4.786 ccw(c-53.779,5.164) -53.779,4.63 R9.1@-51.7,4.63 -51.518,4.63 ccw(c-51.518,5.062) -51.202,4.768 -50.048,6.009 -49.892,6.176 cw(c-49.85,6.137) -49.85,6.195 Q2.3@-49.56,6.195
JACK-1-ENC-B: P4.1 Q1.3 R8.1 | length 7.4
  Top Layer w0.254: P4.1@-55.565,10.005 -53.771,11.799 cw(c-53.289,11.318) -53.289,11.999 R8.1@-51.7,11.999 -51.504,11.999 cw(c-51.504,11.579) -51.207,11.876 -50.127,10.795 ccw(c-50.064,10.858) -50.064,10.769 -49.757,10.769 cw(c-49.757,10.71) -49.716,10.752 Q1.3@-49.56,10.596
JACK-2-ENC-A: P10.2 Q28.3 R106.1 | length 7.3
  Top Layer w0.254: P10.2@-55.565,15.195 -54.028,13.658 ccw(c-53.616,14.07) -53.616,13.487 R106.1@-51.7,13.487 -51.54,13.487 ccw(c-51.54,13.98) -51.185,13.638 -49.897,14.975 cw(c-49.844,14.924) -49.844,14.998 Q28.3@-49.56,14.998
JACK-2-ENC-B: P10.1 Q27.3 R105.1 | length 7.3
  Top Layer w0.254: P10.1@-55.565,19.005 -53.899,20.671 cw(c-53.453,20.224) -53.453,20.856 R105.1@-51.7,20.856 -51.536,20.856 cw(c-51.536,20.359) -51.185,20.71 -49.897,19.422 ccw(c-49.844,19.475) -49.844,19.399 Q27.3@-49.56,19.399
jack_extend1: K1.1 P3.1 | length 23
  Bottom Layer w1.5: P3.1@-8.105,-38.365 -8.105,-35.505 -2.9,-30.3 K1.1@-2.9,-17.5
jack_extend2: K5.1 P9.1 | length 25.4
  Bottom Layer w1.5: P9.1@-37.805,-38.365 -37.305,-37.865 -37.305,-36.405 -34.7,-33.8 -33.1,-33.8 -29.1,-29.8 K5.1@-29.1,-17.5
jack_retract1: K2.1 P3.2 | length 28.9
  Bottom Layer w1.5: P3.2@-4.295,-38.365 -0.702,-34.772 -0.702,-28.602 3.3,-24.6 6.5,-24.6 10.4,-20.7 10.4,-17.7 K2.1@10.2,-17.5
jack_retract2: K6.1 P9.2 | length 30.7
  Bottom Layer w1.5: P9.2@-33.995,-38.365 -26.8,-31.17 -26.8,-27.7 -24.1,-25 -20,-25 -16,-21 K6.1@-16,-17.5
Motor1_NC: J4.03 K3.3 | length 6.1
  Bottom Layer w1.7: K3.3@-23.325,31.2 -23.325,31.369 -20.395,34.299 -20.395,35.85 J4.03@-20.245,36
Motor1_NO: J4.01 K4.3 | length 9.1
  Bottom Layer w1.7: K4.3@-37.525,31.2 -35.205,31.2 J4.01@-30.405,36
Motor2_NC: J13.03 K7.3 | length 6.2
  Bottom Layer w1.7: K7.3@5.325,31.45 8.16,34.285 J13.03@8.16,36
  Bottom Layer w2: K7.3@5.075,31.2 5.075,31.45 K7.3@5.325,31.45
Motor2_NO: J13.01 K8.3 | length 9.1
  Bottom Layer w2: K8.3@-9.125,31.2 -6.8,31.2 J13.01@-2,36
MOTOR-1-ENC-A: P7.2 Q6.3 R15.1 | length 7.4
  Top Layer w0.254: P7.2@-55.565,33.195 -54.064,33.195 -52.07,31.201 R15.1@-51.7,31.201 -51.33,31.201 -50.101,32.431 -49.733,32.431 Q6.3@-49.56,32.604
MOTOR-1-ENC-B: P7.1 Q5.3 R14.1 | length 7.3
  Top Layer w0.254: P7.1@-55.565,37.005 -53.635,37.005 -52.07,38.57 R14.1@-51.7,38.57 -51.33,38.57 -50.048,37.191 -49.875,37.005 Q5.3@-49.56,37.005
MOTOR-2-ENC-A: P13.2 Q32.3 R112.1 | length 7.3
  Top Layer w0.254: P13.2@-55.565,24.195 -53.899,22.529 ccw(c-53.453,22.976) -53.453,22.344 R112.1@-51.7,22.344 -51.536,22.344 ccw(c-51.536,22.841) -51.185,22.49 -49.897,23.778 cw(c-49.844,23.725) -49.844,23.801 Q32.3@-49.56,23.801
MOTOR-2-ENC-B: P13.1 Q31.3 R111.1 | length 7.3
  Top Layer w0.254: P13.1@-55.565,28.005 -54.028,29.542 cw(c-53.616,29.13) -53.616,29.713 R111.1@-51.7,29.713 -51.54,29.713 cw(c-51.54,29.22) -51.185,29.562 -49.897,28.225 ccw(c-49.844,28.276) -49.844,28.202 Q31.3@-49.56,28.202
NetC4_2: C4.2 R2.1 R3.2 U3.47 | length 38.3
  Top Layer w0.254: C4.2@-38.764,-30.2 -38.764,-20.764 -32.6,-14.6 -29.2,-14.6 -23.4,-8.8 -23.4,-6.2 -23.65,-5.95 U3.47@-24.67,-5.95
  Top Layer w0.5: C4.2@-38.764,-30.2 -38.697,-30.267 -38.697,-32.433 R3.2@-38.63,-32.5 -38.43,-32.7 R2.1@-36.6,-32.7 R2.1@-36.5,-32.8
NetC11_2: C11.2 R5.1 U3.12 | length 5.7
  Top Layer w0.254: U3.12@-13.33,-0.95 -11.85,-0.95 -11.082,-0.182 R5.1@-9.7,-0.182 C11.2@-9.7,1.585
NetC12_2: C12.2 Q2.2 R11.1 U3.37 | length 28.6
  Top Layer w0.254: Q2.2@-47.44,7.145 -47.156,7.145 ccw(c-47.156,7.221) -47.103,7.167 -46.742,7.527 cw(c-46.64,7.425) -46.64,7.57 R11.1@-44.6,7.57 -44.23,7.57 -43.867,7.207 -43.867,6.615 ccw(c-43.708,6.615) -43.821,6.503 -38.3,0.983 -38.3,0.309 ; C12.2@-37.827,0.109 C12.2@-38.3,-0.364 -38.3,0.309 ; U3.37@-24.67,-0.95 -27.619,-0.95 -28.708,0.139 -38.13,0.139 -38.3,0.309
NetC14_2: C14.2 Q6.2 R17.1 U3.29 | length 58.3
  Top Layer w0.254: Q6.2@-47.44,33.554 -47.156,33.554 ccw(c-47.156,33.63) -47.103,33.576 -46.596,34.083 cw(c-46.454,33.941) -46.454,34.141 R17.1@-44.6,34.141 ; v4(-46,32.8) -44.9,32.8 -44.6,33.1 R17.1@-44.6,34.141 ; -21.304,5.647 -21.304,5.701 -27.003,11.4 -34.05,11.4 -35.65,9.8 -37.4,9.8 -41.097,13.497 -41.097,18.947 -42.205,20.055 -42.205,32.074 -43.867,33.736 -43.867,33.778 -44.23,34.141 R17.1@-44.6,34.141 ; U3.29@-21.25,2.97 -21.25,5.647
  Bottom Layer w0.254: v4(-46,32.8) -44.864,33.936 C14.2@-43.2,33.936
NetC15_2: C15.2 R52.1 SW1.4 U3.2 | length 38
  Top Layer w0.254: U3.2@-13.33,-5.95 -12.29,-5.95 -11.049,-7.191 -8.309,-9.931 -0.453,-9.931 0.1,-9.378 0.1,1.462 4.413,5.776 4.413,6.443 R52.1@4.77,6.8 SW1.4@7,6.8 C15.2@7,4.436
NetC16_2: C16.2 Q25.2 R55.2 U3.64 | length 47.5
  Top Layer w0.254: U3.64@-15.25,-8.37 -12.683,-8.37 -10.013,-11.039 15.101,-11.039 16.97,-9.17 R55.2@16.97,-8.8 ; R55.2@16.97,-8.43 16.45,-7.91 Q25.2@16.45,-5.56 16.45,-5.245 18,-3.695 18,2.991 17.527,3.464 C16.2@17.4,3.464